# Altium PCB SCapacitor2.0_2020-03-19_00-03-24.pcbdoc (part 1 of 2)
Units mm, origin at the board's own origin, x right, y up, seen from the top; angles counter-clockwise.
Board outline 110 x 60 mm, 2 copper layers (Top Layer, Bottom Layer); 200 components, 118 nets, 675 pads, 143 vias.
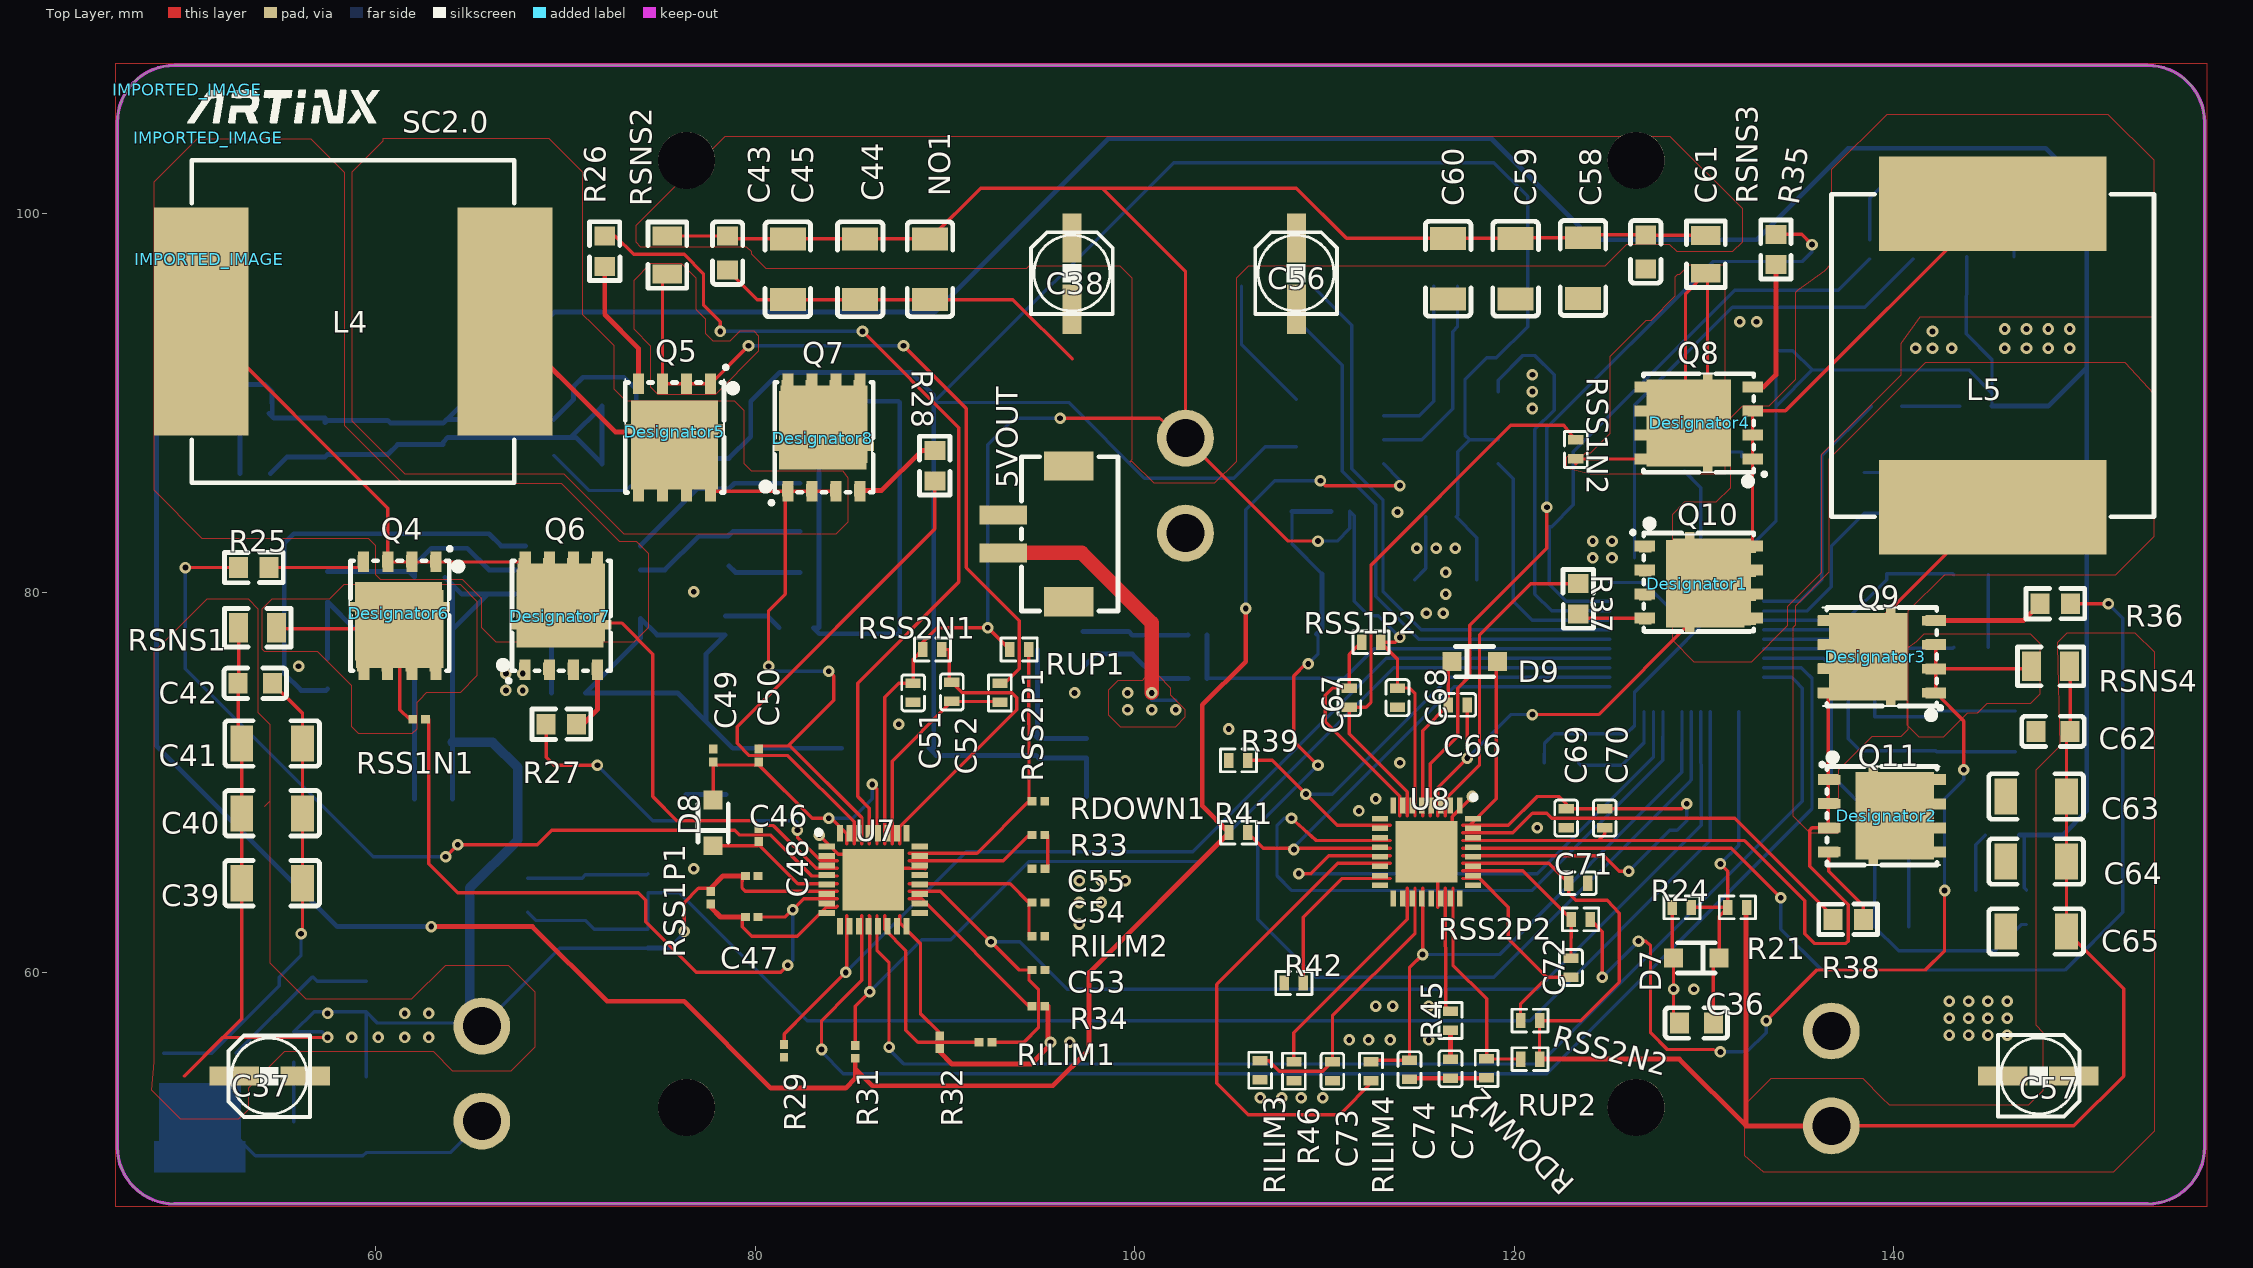
[diagram p0: Top Layer view]
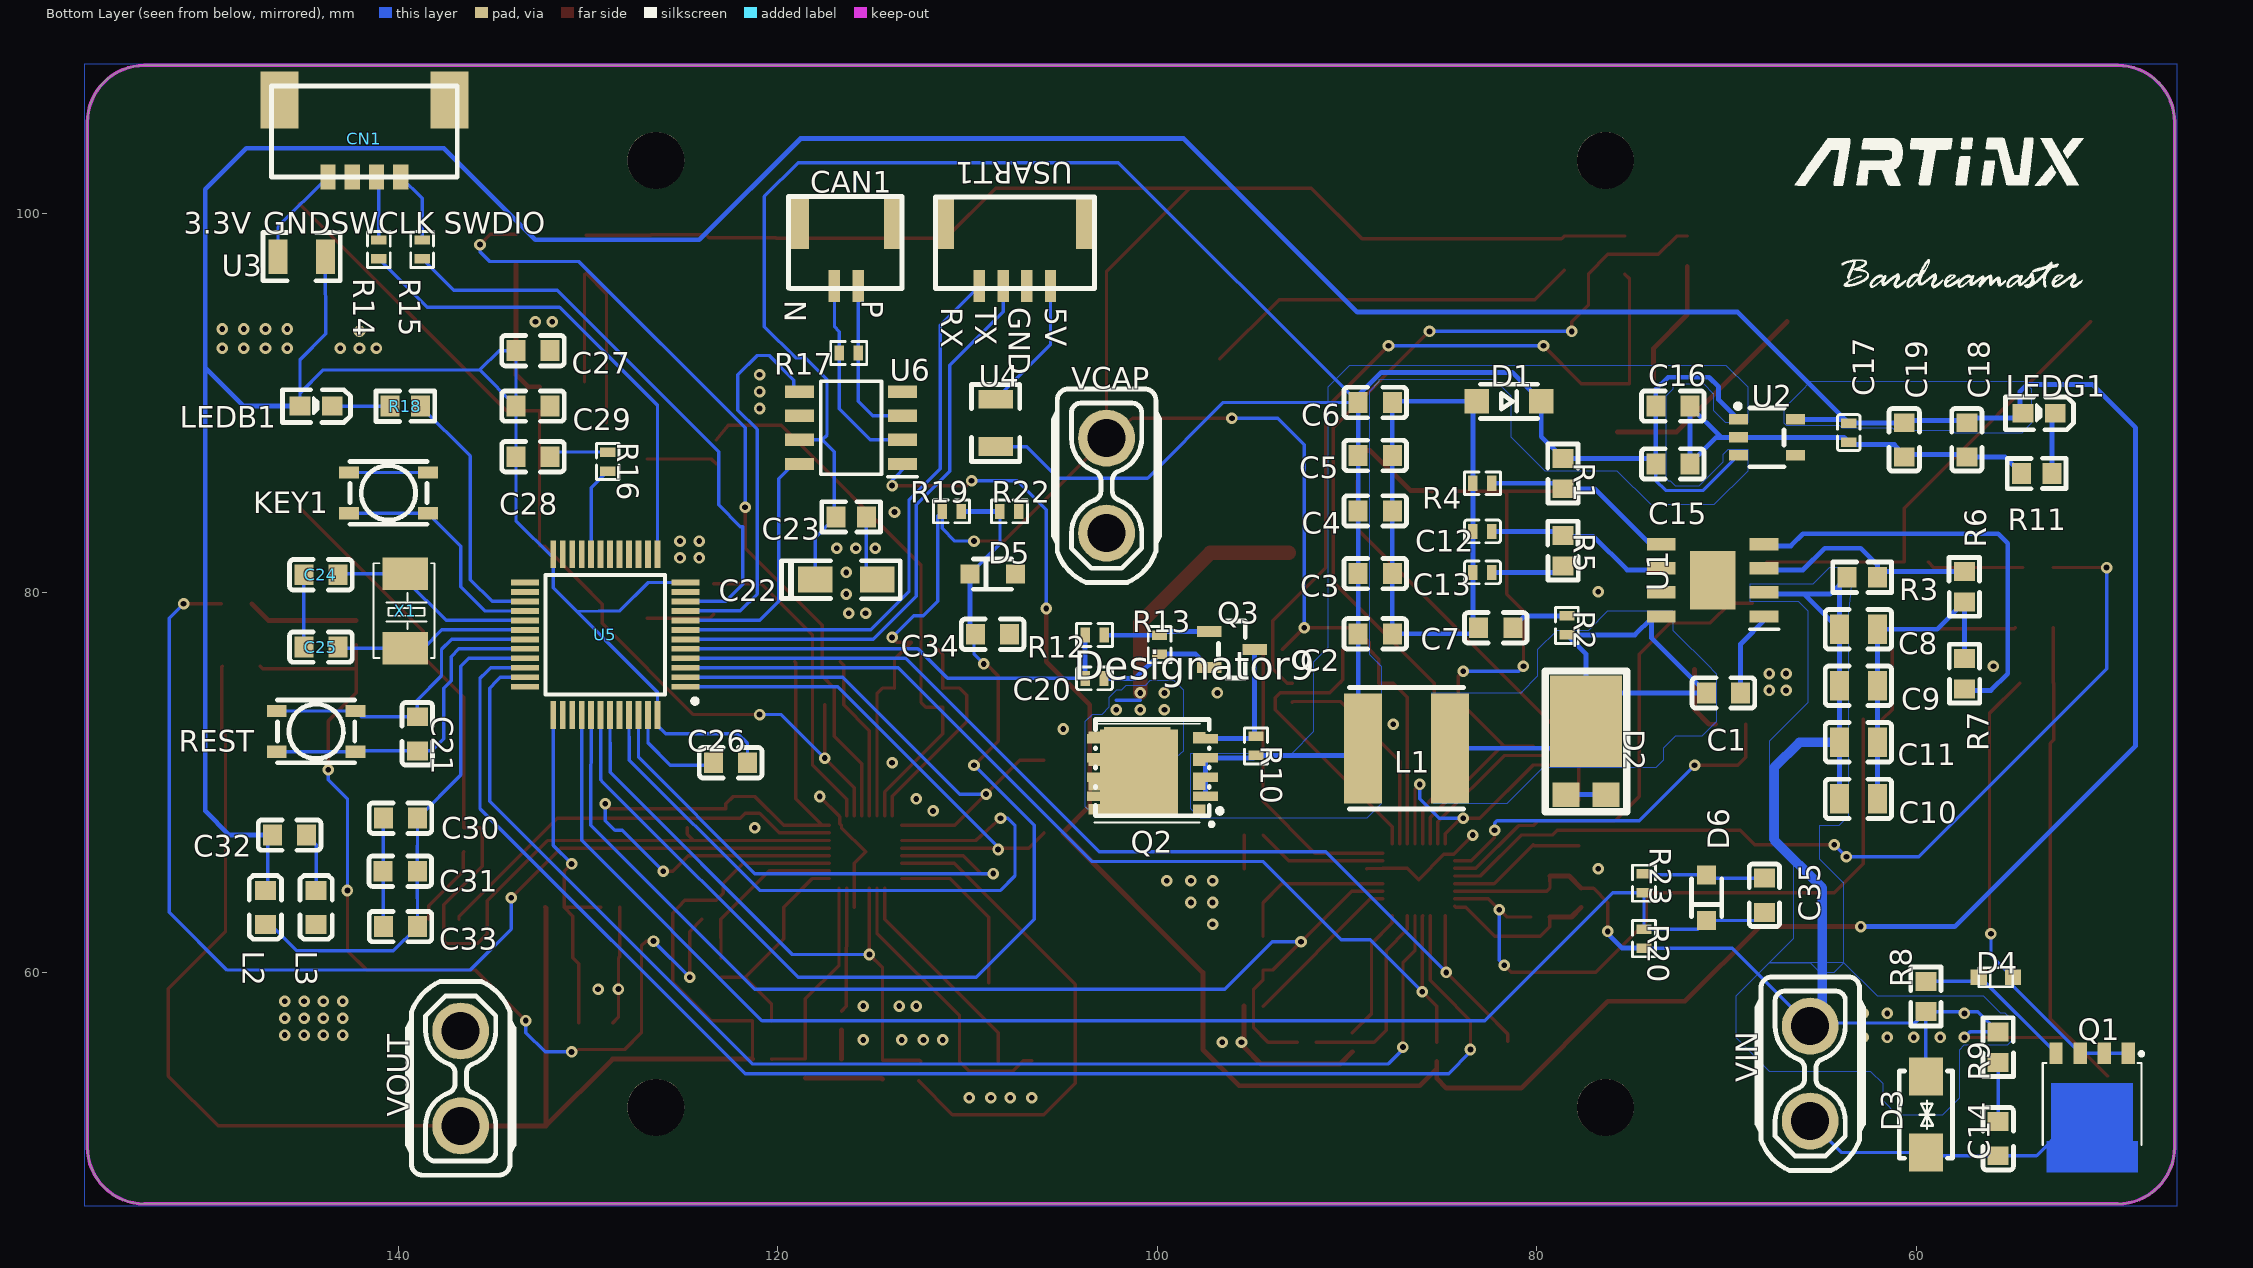
[diagram p1: Bottom Layer view, seen from below]

## Layer stack, top to bottom
Top Solder: solder mask 0.0102, Solder Resist, Dk 3.5
Top Layer: signal copper 0.0356
Dielectric1: dielectric 0.32, FR-4, Dk 4.8
Bottom Layer: signal copper 0.0356
Bottom Solder: solder mask 0.0102, Solder Resist, Dk 3.5

## Board outline
46.394,50.778 46.394,104.778 46.394,104.779 cw(c49.394,104.779) 49.394,107.779 49.394,107.78 153.394,107.78 cw(c153.393,104.779) 156.394,104.779 156.394,104.778 156.394,50.778 cw(c153.394,50.777) 153.394,47.777 49.394,47.777 cw(c49.394,50.778)

## Design rules (kind name [scope] priority, off if disabled: settings)
Clearance [All] p1: gap=0.254 ignorepadtopadclearanceinfootprint=FALSE except(0: Arc-Hole Track-Hole SMDPad-Hole THPad-Hole Via-Hole Fill-Hole Poly-Hole Region-Hole Text-Hole)
PolygonConnect [All] p1: connectstyle=Relief reliefconductorwidth=0.254 reliefentries=4 polygonreliefangle="90 Angle" airgapwidth=0.254
RoutingVias [All] p1: holewidth=0.711 width=1.27 viastyle="Through Hole" minholewidth=0.711 minwidth=1.27 maxholewidth=0.711 maxwidth=1.27
SolderMaskExpansion [All] p1: expansion=0.102
Width [All] p1: maxlimit=0.254 minlimit=0.254 preferedwidth=0.254
30 further rules are at their usual default settings.

## Components (designator, comment, footprint, x,y, rotation, side; value= is the part's Value field where it differs from the comment)
5VOUT "A2008WV-S-2P" CONN-SMD_A2008WV-S-2P 94.809,83.094 r90 top
C1 "100nF" C0603#1 70.172,74.712 r180 bottom
C2 "100nF" C0603#1 88.523,77.823 r180 bottom
C3 "22uF" C0603#1 88.523,80.998 r180 bottom
C4 "22uF" C0603#1 88.523,84.3 r180 bottom
C5 "22uF" C0603#1 88.523,87.221 r180 bottom
C6 "22uF" C0603#1 88.523,90.015 r180 bottom
C7 "100pF" C0603#1 82.173,78.141 r180 bottom
C8 "4.7uF" C0805 63.058,78.062 r180 bottom
C9 "4.7uF" C0805 63.058,75.082 r180 bottom
C10 "4.7uF" C0805 63.058,69.124 r180 bottom
C11 "4.7uF" C0805 63.058,72.103 r180 bottom
C12 "47pF" C0402#1 82.873,83.221 r0 bottom
C13 "4.7nF" C0402#1 82.873,81.062 r0 bottom
C14 "10nf" C0603#1 55.694,51.217 r270 bottom
C15 "22uF" C0603#1 72.839,86.777 r180 bottom
C16 "22uF" C0603#1 72.839,89.825 r180 bottom
C17 "100nF" C0402#1 63.567,88.428 r270 bottom
C18 "22uF" C0603#1 57.345,88.047 r270 bottom
C19 "22uF" C0603#1 60.646,88.047 r270 bottom
C20 "47pF" C0402#1 103.318,75.474 r180 bottom
C21 "100nF" C0603#1 139.007,72.553 r270 bottom
C22 "47uF" CASE-A_3216 116.399,80.681 r180 bottom
C23 "100nF" R0603#1 116.145,83.983 r0 bottom
C24 "33pF" C0603#1 144.087,80.935 r0 bottom
C25 "33pF" C0603#1 144.087,77.125 r0 bottom
C26 "100nF" C0603#1 122.495,71.029 r0 bottom
C27 "100nF" C0603#1 132.909,92.746 r0 bottom
C28 "100nF" C0603#1 132.909,87.158 r180 bottom
C29 "4.7uF" C0603#1 132.909,89.825 r180 bottom
C30 "1uF" C0603#1 139.894,68.108 r0 bottom
C31 "10nF" C0603#1 139.904,65.314 r0 bottom
C32 "100nF" C0603#1 145.74,67.215 r180 bottom
C33 "100nF" C0603#1 139.894,62.393 r0 bottom
C34 "100nf" C0603#1 108.687,77.798 r180 bottom
C35 "100nf" C0603#1 68.013,64.044 r90 bottom
C36 "100nf" C0603#2 129.608,57.313 r0 top
C37 "220uF" SMD-EC-F4 54.423,54.519 r0 top
C38 "220uF" SMD-EC-F4 96.714,96.81 r270 top
C39 "10uF" C1206 54.55,64.679 r180 top
C40 "10uF" C1206 54.55,68.362 r180 top
C41 "10uF" C1206 54.55,72.045 r180 top
C42 "100nF" C0603#2 53.662,75.22 r180 top
C43 "100nF" C0603#2 78.554,97.887 r90 top
C44 "10uF" C1206 85.538,97.036 r90 top
C45 "10uF" C1206 81.728,97.036 r90 top
C46 "100nf" CAPC0603X33N 80.204,67.219 r90 top
C47 "47pf" CAPC0603X33N 79.823,62.901 r180 top
C48 "1u" CAPC0603X33N 79.823,65.06 r180 top
C49 "1u" CAPC0603X33N 77.791,71.41 r90 top
C50 "100nf" CAPC0603X33N 80.204,71.41 r270 top
C51 "1uf" C0402#2 88.332,74.712 r90 top
C52 "47pf" C0402#2 90.371,74.76 r90 top
C53 "10nf" CAPC0603X33N 94.936,60.107 r180 top
C54 "2.2nf" CAPC0603X33N 94.936,63.663 r180 top
C55 "47nf" CAPC0603X33N 94.936,65.441 r0 top
C56 "220uF" SMD-EC-F4 108.525,96.81 r270 top
C57 "220uF" SMD-EC-F4 147.629,54.519 r180 top
C58 "10uF" C1206 123.638,97.102 r90 top
C59 "10uF" C1206 120.082,97.064 r90 top
C60 "10uF" C1206 116.526,97.064 r90 top
C61 "100nF" C0603#2 126.94,97.953 r90 top
C62 "100nF" C0603#2 148.404,72.68 r0 top
C63 "10uF" C1206 147.514,69.251 r0 top
C64 "10uF" C1206 147.514,65.822 r0 top
C65 "10uF" C1206 147.514,62.139 r0 top
C66 "1u" C0402#2 117.034,74.077 r0 top
C67 "47pf" C0402#2 111.319,74.458 r90 top
C68 "1u" C0402#2 113.859,74.458 r90 top
C69 "1u" C0402#2 122.749,68.108 r270 top
C70 "1u" C0402#2 124.781,68.108 r90 top
C71 "1uf" C0402#2 123.384,64.679 r180 top
C72 "47pf" C0402#2 123.003,60.234 r270 top
C73 "2.2nf" C0402#2 110.43,54.773 r90 top
C74 "10nf" C0402#2 114.491,54.849 r90 top
C75 "47nf" C0402#2 116.653,54.9 r90 top
CAN1 "GH1.25-2P-立式贴片" SMD-1.25MM-2P-JST-H4.05 116.399,97.826 r0 bottom
CN1 "molexP4卧" SMD-10.15X4.8-4P 141.799,103.922 r180 bottom
D1 "BZT52C5V1_C173407" SOD-123_L2.7-W1.6-LS3.7-RD 81.474,90.079 r180 bottom
D2 "SVM860VB_R2_00001" TO-277B_3P-L6.1-W4.3-LS7.0-BR 77.41,71.283 r90 bottom
D3 "SMAJ26CA-13-F" SMA_L4.4-W2.6-LS5.0-BI 59.503,52.487 r270 bottom
D4 "BZX584C9V1" SOD-523F_L1.7-W0.9-LS1.7-RD 55.82,59.726 r0 bottom
D5 "BZT52C3V3S_C173439" SOD-323_L1.8-W1.3-LS2.5-RD#1 108.687,80.973 r0 bottom
D6 "BZT52C3V3S_C173439" SOD-323_L1.8-W1.3-LS2.5-RD#1 71.06,63.917 r270 bottom
D7 "BZT52C3V3S_C173439" SOD-323_L1.8-W1.3-LS2.5-RD#2 129.607,60.742 r180 top
D8 "1N4148WS T4" SOD-323_L1.8-W1.3-LS2.5-FD 77.791,67.854 r270 top
D9 "1N4148WS T4" SOD-323_L1.8-W1.3-LS2.5-FD 117.923,76.363 r180 top
Designator1 "Comment" AON6508 129.667,80.465 r270 top
Designator2 "Comment" AON6508 139.64,68.235 r270 top
Designator3 "Comment" AON6508 139.065,76.617 r90 top
Designator4 "Comment" AON6508 129.794,88.936 r90 top
Designator5 "Comment" AON6508 75.759,88.462 r180 top
Designator6 "Comment" AON6508 61.214,78.903 r180 top
Designator7 "Comment" AON6508 69.723,78.74 r0 top
Designator8 "Comment" AON6508 83.566,88.133 r0 top
Designator9 "Comment" AON6508 100.55,70.485 r90 bottom
IMPORTED_IMAGE "Comment" IMPORTED_IMAGE 50.069,106.497 r0 top
IMPORTED_IMAGE "Comment" IMPORTED_IMAGE 51.248,97.561 r0 top
IMPORTED_IMAGE "Comment" IMPORTED_IMAGE 51.176,103.972 r0 top
KEY1 "SKRPABE010" KEY-SMD-4P_L4.2-W3.2-H2.5 140.529,85.253 r0 bottom
L1 "4.7uH" IND-SMD_L6.0-W6.0 86.872,71.791 r180 bottom
L2 "10uH" L0603 147.01,63.403 r90 bottom
L3 "10uH" L0603 144.343,63.403 r90 bottom
L4 "2.2uH" IND-SMD_L17.5-W17.0_YXMAC1770 58.815,94.283 r0 top
L5 "2.2uH" IND-SMD_L17.5-W17.0_YXMAC1770 145.228,92.492 r270 top
LEDB1 "LEDB" LED-0603 144.339,89.825 r180 bottom
LEDG1 "LED3V3" LED-0603 53.534,89.444 r180 bottom
NO1 "10uF" C1206 89.221,97.036 r90 top
Q1 "PSMN1R5-30YLC,115" SOT-669_L4.9-W4.0-P1.27-LS6.0-BR 50.741,53.757 r270 bottom
Q2 "TPCA8123,L1Q" POWERVDFN-8_L6.0-W5.0-P1.27-BL 100.27,70.775 r270 bottom
Q3 "PMBT3904,215" SOT-23_L2.9-W1.3-P0.95-LS2.4-BR 96.078,76.998 r180 bottom
Q4 "HD70N08" "PDFN-8_L4.9-W5.8-P1.27-LS6.1-BL FOR3" 61.281,78.776 r180 top
Q5 "HD70N08" "PDFN-8_L4.9-W5.8-P1.27-LS6.1-BL FOR3" 75.759,88.174 r180 top
Q6 "HD70N08" "PDFN-8_L4.9-W5.8-P1.27-LS6.1-BL FOR3" 69.79,78.776 r0 top
Q7 "HD70N08" "PDFN-8_L4.9-W5.8-P1.27-LS6.1-BL FOR3" 83.633,88.174 r0 top
Q8 "HD70N08" "PDFN-8_L4.9-W5.8-P1.27-LS6.1-BL FOR3" 129.734,88.936 r90 top
Q9 "HD70N08" "PDFN-8_L4.9-W5.8-P1.27-LS6.1-BL FOR3" 139.386,76.617 r90 top
Q10 "HD70N08" "PDFN-8_L4.9-W5.8-P1.27-LS6.1-BL FOR3" 129.734,80.554 r270 top
Q11 "HD70N08" "PDFN-8_L4.9-W5.8-P1.27-LS6.1-BL FOR3" 139.386,68.235 r270 top
R1 "40.2K" R0603#1 78.625,86.269 r270 bottom
R2 "100" R0402#1 78.425,78.267 r270 bottom
R3 "309K" R0603#1 62.859,80.808 r180 bottom
R4 "7.68K" R0402#1 82.873,85.76 r0 bottom
R5 "17.8K" R0603#1 78.625,82.205 r270 bottom
R6 "68K" R0603#1 57.472,80.3 r270 bottom
R7 "68K" R0603#1 57.472,75.728 r90 bottom
R8 "100k" R0603#1 59.504,58.71 r90 bottom
R9 "33R" R0603#1 55.694,56.043 r270 bottom
R10 "10K" R0402#1 94.808,71.917 r90 bottom
R11 "1K" R0603#1 53.662,86.269 r0 bottom
R12 "1K" R0402#1 103.317,77.759 r0 bottom
R13 "10K" R0402#1 99.888,77.251 r270 bottom
R14 "120" R0402#1 141.037,98.078 r90 bottom
R15 "120" R0402#1 138.751,98.078 r90 bottom
R16 "10K" R0402#1 128.972,86.904 r90 bottom
R17 "120" R0402#1 116.272,92.62 r180 bottom
R18 "1K" R0603#1 139.641,89.825 r180 bottom
R19 "100K" R0402#1 110.848,84.275 r180 bottom
R20 "100K" R0402#1 74.361,61.757 r90 bottom
R21 "100K" R0402#2 131.768,63.408 r0 top
R22 "10K" R0402#1 107.8,84.275 r180 bottom
R23 "10K" R0402#1 74.361,64.678 r90 bottom
R24 "10K" R0402#2 128.847,63.408 r0 top
R25 "0" R0603#2 53.588,81.316 r0 top
R26 "0" R0603#2 72.077,97.986 r90 top
R27 "0" R0603#2 69.791,73.061 r0 top
R28 "0" R0603#2 89.476,86.683 r90 top
R29 "1k" CAPC0603X33N 81.529,55.844 r270 top
R31 "1k" CAPC0603X33N 85.283,55.788 r90 top
R32 "NC/270K/68K/0" CAPC0603X33N 89.728,56.296 r90 top
R33 "4.99k" CAPC0603X33N 94.935,67.218 r180 top
R34 "0/68K/NC" CAPC0603X33N 94.935,58.201 r180 top
R35 "0" R0603#2 133.799,98.08 r270 top
R36 "0" R0603#2 148.531,79.411 r0 top
R37 "0" R0603#2 123.385,79.665 r270 top
R38 "0" R0603#2 137.609,62.774 r0 top
R39 "1k" R0402#2 105.476,71.155 r180 top
R41 "1k" R0402#2 105.479,67.345 r0 top
R42 "NC/270K/68K/0" R0402#2 108.394,59.421 r0 top
R45 "4.99k" R0402#2 116.652,57.439 r90 top
R46 "0/68K/NC" R0402#2 108.397,54.772 r90 top
RDOWN1 "1k" CAPC0603X33N 94.935,68.996 r180 top
RDOWN2 "1k" R0402#2 118.554,54.917 r90 top
REST "SKRPABE010" KEY-SMD-4P_L4.2-W3.2-H2.5 144.34,72.68 r180 bottom
RILIM1 "10K" CAPC0603X33N 92.144,56.296 r0 top
RILIM2 "10K" CAPC0603X33N 94.935,61.884 r180 top
RILIM3 "10K" R0402#2 106.619,54.823 r90 top
RILIM4 "6.04K" R0402#2 112.461,54.772 r90 top
RSNS1 "0.01" R0805 53.787,78.141 r0 top
RSNS2 "0.01" R0805 75.377,97.785 r90 top
RSNS3 "0.01" R0805 130.114,97.826 r270 top
RSNS4 "0.01" R0805 148.275,76.109 r0 top
RSS1N1 "1k" CAPC0603X33N 62.296,73.314 r180 top
RSS1N2 "1k" R0402#2 123.257,87.539 r270 top
RSS1P1 "1k" CAPC0603X33N 77.663,63.916 r90 top
RSS1P2 "1k" R0402#2 112.464,77.378 r0 top
RSS2N1 "1k" R0402#2 89.347,76.997 r180 top
RSS2N2 "1K" R0402#2 120.846,57.439 r0 top
RSS2P1 "1k" R0402#2 92.903,74.711 r90 top
RSS2P2 "1k" R0402#2 123.513,62.773 r0 top
RUP1 "20.5K" R0402#2 93.919,76.997 r180 top
RUP2 "20K" R0402#2 120.846,55.407 r0 top
U1 "TPS54540DDAR" SOIC127P600X170-9N 70.739,80.645 r0 bottom
U2 "LP5907MFX-2.5/NOPB" SOT-23-5_L3.0-W1.7-P0.95-LS2.8-BL 67.885,88.174 r90 bottom
U3 "MF-NSMF050-2" FUSE-1206 145.101,97.699 r180 bottom
U4 "MF-NSMF050-2" FUSE-1206 108.525,88.936 r270 bottom
U5 "STM32F103C8T6" QFP50P900X900X160-48N 129.099,77.779 r0 bottom
U6 "TJA1051T/3/1J" SOIC127P600X175-8N 116.145,88.682 r0 bottom
U7 "SC8701QDER" QFN50P500X500X100-33N-D 86.229,64.86 r0 top
U8 "SC8701QDER" QFN50P500X500X100-33N-D 115.383,66.33 r270 top
USART1 "GH1.25-4P-立式贴片" SMD-1.25MM-4P-JST-H4.05 107.509,97.826 r0 bottom
VCAP "XT30UF" CONN-TH_XT30UPB-F 102.683,85.634 r90 bottom
VIN "XT30UM" CONN-TH_XT30UPB-F 65.599,54.646 r90 bottom
VOUT "XT30UF" CONN-TH_XT30UPB-F 136.719,54.392 r270 bottom
X1 "8MHz" SMD-5032_2P 139.641,79.03 r90 bottom
? "" ? 150.91,77.859 r0 top
? "" ? 101.422,109.456 r0 top
? "" ? 57.272,77.779 r0 top
? "" ? 101.394,45.542 r0 top
? "" ? 61.394,45.509 r0 top

## Footprints (in the part's own frame and the unit in brackets; to place one, negate y for a bottom-side part, rotate by r counter-clockwise, add the part's x,y. Pads: shape width x height; smd on the part's side, far side on the other; paste and mask are expansions set on the pad)
AON6508 [mm]
  rect 0.5x0.65 smd: 1(-1.905,-2.75) 2(-0.635,-2.75) 3(0.635,-2.75) 4(1.905,-2.75)
  rect 0.55x0.65 smd: 5(1.905,2.75) 6(0.635,2.75) 7(-0.635,2.75) 8(-1.905,2.75)
  rect 4.6x4.12 smd: 9(0,0.415)
  silkscreen extent -2.8,-3.5 2.6,2.8, body extent -2.6,-3.03 2.6,3.02, height 1.1
C0402#1 [mm]
  rect 0.5x0.8 smd: 1(0.5,0) 2(-0.5,0)
  silkscreen extent -0.95,-0.6 0.95,0.6
C0402#2 [mm]
  rect 0.5x0.8 smd: 1(-0.5,0) 2(0.5,0)
  silkscreen extent -0.95,-0.6 0.95,0.6
C0603#1 [mm]
  rect 1x1.1 smd: 1(0.9,0) 2(-0.9,0)
  silkscreen extent -1.65,-0.8 1.65,0.8
C0603#2 [mm]
  rect 1x1.1 smd: 1(-0.9,0) 2(0.9,0)
  silkscreen extent -1.65,-0.8 1.65,0.8
C0805 [mm]
  rect 1x1.55 smd: 1(1,0) 2(-1,0)
  silkscreen extent -1.75,-1.04 1.75,1.04
C1206 [mm]
  rect 1.2x1.9 smd: 1(-1.6,0) 2(1.6,0)
  silkscreen extent -2.5,-1.2 2.5,1.2
CAPC0603X33N [mm]
  rect 0.47x0.44 smd: 1(-0.335,0) 2(0.335,0)
  body extent -0.3,-0.15 0.3,0.15, height 0.33
CASE-A_3216 [mil]
  rect 71.5x53.5 smd: 1(-64.5,0) 2(64.5,0)
  silkscreen extent -134,-40 112,39
CONN-SMD_A2008WV-S-2P [mil]
  rect 61x102.4 smd: 0(-140.76,-67.89) 0(140.76,-67.89)
  rect 39.4x98.4 smd: 1(-39.36,67.91) 2(39.34,67.91)
  silkscreen extent -160,-170 160,30
CONN-TH_XT30UPB-F [mm]
  round 3 hole 2: 1(2.499,0) 2(-2.501,0)
  silkscreen extent -5.1,-2.8 5.1,2.8
FUSE-1206 [mm]
  rect 1x1.801 smd: 1(1.25,0) 2(-1.25,0)
  silkscreen extent -2.03,-1.27 2.03,1.27
IMPORTED_IMAGE [mm]
  silkscreen extent 0,-1.78 10.16,0
IND-SMD_L6.0-W6.0 [mm]
  rect 2x5.8 smd: 1(2.3,0) 2(-2.3,0)
  silkscreen extent -3,-3.2 3,3.2
IND-SMD_L17.5-W17.0_YXMAC1770 [mm]
  rect 5x12 smd: 1(-8,0) 2(8,0)
  silkscreen extent -8.5,-8.5 8.5,8.5
KEY-SMD-4P_L4.2-W3.2-H2.5 [mm]
  rect 1.05x0.65 smd: 1(2.075,-1.075) 2(-2.075,-1.075) 3(2.075,1.075) 4(-2.075,1.075)
  silkscreen extent -2.03,-1.65 2.03,1.65
L0603 [mm]
  rect 1x1.1 smd: 1(0.9,0) 2(-0.9,0)
  silkscreen extent -1.68,-0.85 1.68,0.85
LED-0603 [mil]
  rect 43x39 smd: 1(-33.5,0) 2(33.5,0)
  silkscreen extent -70,-34 72,34
"PDFN-8_L4.9-W5.8-P1.27-LS6.1-BL FOR3" [mm]
  rect 0.58x1.079 smd: 3(-1.905,-2.835) 3(-0.635,-2.835) 3(0.635,-2.835) 4(1.905,-2.835)
  rect 0.95x0.5 smd: 8(-2.169,-0.465) 8(2.169,-0.465)
  rect 0.58x1.08 smd: 8(-1.9,2.835) 8(-0.63,2.835) 8(0.64,2.835) 8(1.9,2.835)
  rect 4.6x4.1 smd: 8(0,0.695)
  silkscreen extent -3.2,-2.89 2.6,2.9
POWERVDFN-8_L6.0-W5.0-P1.27-BL [mil]
  rect 19.68x51.18 smd: 1(60,110.24) 2(20,110.24) 3(-20,110.24) 4(-60,110.24) 5(-60,-110.24) 6(-20,-110.24) 7(20,-110.24) 8(60,-110.24)
  rect 167.32x137.79 smd: 8(0,-31.5)
  silkscreen extent -100,-118 100,145
QFN50P500X500X100-33N-D [mm]
  rect 0.85x0.3 smd: 1(-2.45,1.75) 2(-2.45,1.25) 3(-2.45,0.75) 4(-2.45,0.25) 5(-2.45,-0.25) 6(-2.45,-0.75) 7(-2.45,-1.25) 8(-2.45,-1.75) 17(2.45,-1.75) 18(2.45,-1.25) 19(2.45,-0.75) 20(2.45,-0.25) 21(2.45,0.25) 22(2.45,0.75) 23(2.45,1.25) 24(2.45,1.75)
  rect 0.3x0.85 smd: 9(-1.75,-2.45) 10(-1.25,-2.45) 11(-0.75,-2.45) 12(-0.25,-2.45) 13(0.25,-2.45) 14(0.75,-2.45) 15(1.25,-2.45) 16(1.75,-2.45) 25(1.75,2.45) 26(1.25,2.45) 27(0.75,2.45) 28(0.25,2.45) 29(-0.25,2.45) 30(-0.75,2.45) 31(-1.25,2.45) 32(-1.75,2.45)
  rect 3.25x3.25 smd: 33(0,0)
  silkscreen extent -3,2.38 -2.75,2.62, body extent -2.55,-2.55 2.55,2.55, height 1
QFP50P900X900X160-48N [mm]
  rect 1.475x0.3 smd: 1(-4.238,2.75) 2(-4.238,2.25) 3(-4.238,1.75) 4(-4.238,1.25) 5(-4.238,0.75) 6(-4.238,0.25) 7(-4.238,-0.25) 8(-4.238,-0.75) 9(-4.238,-1.25) 10(-4.238,-1.75) 11(-4.238,-2.25) 12(-4.238,-2.75) 25(4.238,-2.75) 26(4.238,-2.25) 27(4.238,-1.75) 28(4.238,-1.25) 29(4.238,-0.75) 30(4.238,-0.25) 31(4.238,0.25) 32(4.238,0.75) 33(4.238,1.25) 34(4.238,1.75) 35(4.238,2.25) 36(4.238,2.75)
  rect 0.3x1.475 smd: 13(-2.75,-4.238) 14(-2.25,-4.238) 15(-1.75,-4.238) 16(-1.25,-4.238) 17(-0.75,-4.238) 18(-0.25,-4.238) 19(0.25,-4.238) 20(0.75,-4.238) 21(1.25,-4.238) 22(1.75,-4.238) 23(2.25,-4.238) 24(2.75,-4.238) 37(2.75,4.238) 38(2.25,4.238) 39(1.75,4.238) 40(1.25,4.238) 41(0.75,4.238) 42(0.25,4.238) 43(-0.25,4.238) 44(-0.75,4.238) 45(-1.25,4.238) 46(-1.75,4.238) 47(-2.25,4.238) 48(-2.75,4.238)
  silkscreen extent -4.85,-3.15 3.15,3.62, body extent -4.5,-4.5 4.5,4.5, height 1.6
R0402#1 [mm]
  rect 0.5x0.8 smd: 1(0.5,0) 2(-0.5,0)
  silkscreen extent -0.95,-0.6 0.95,0.6
R0402#2 [mm]
  rect 0.5x0.8 smd: 1(-0.5,0) 2(0.5,0)
  silkscreen extent -0.95,-0.6 0.95,0.6
R0603#1 [mm]
  rect 1x1.1 smd: 1(0.8,0) 2(-0.8,0)
  silkscreen extent -1.55,-0.81 1.55,0.8
R0603#2 [mm]
  rect 1x1.1 smd: 1(-0.8,0) 2(0.8,0)
  silkscreen extent -1.55,-0.8 1.55,0.81
R0805 [mm]
  rect 1x1.55 smd: 1(-1,0) 2(1,0)
  silkscreen extent -1.75,-1.02 1.75,1.02
SMA_L4.4-W2.6-LS5.0-BI [mm]
  rect 2x1.8 smd: 1(2,0) 2(-2,0)
  silkscreen extent -2.3,-1.4 2.3,1.4
SMD-1.25MM-2P-JST-H4.05 [mm]
  rect 0.599x1.702 smd: 1(0.625,1.675) 2(-0.625,1.675)
  rect 0.998x2.799 smd: 3(2.475,-1.675)
  rect 1x2.8 smd: 4(-2.475,-1.675)
  silkscreen extent -2.94,-3.05 3.05,1.8
SMD-1.25MM-4P-JST-H4.05 [mm]
  rect 0.599x1.702 smd: 1(1.875,1.675) 2(0.625,1.675) 3(-0.625,1.675) 4(-1.875,1.675)
  rect 1x2.8 smd: 5(3.725,-1.675) 6(-3.725,-1.675)
  silkscreen extent -4.19,-3.02 4.19,1.8
SMD-10.15X4.8-4P [mm]
  rect 2x3 smd: 0(-4.479,2.025) 0(4.479,2.025)
  rect 0.8x1.3 smd: 1(-1.92,-2.025) 2(-0.64,-2.025) 3(0.64,-2.025) 4(1.92,-2.025)
  silkscreen extent -4.9,-2.03 4.9,2.78
SMD-5032_2P [mm]
  rect 1.7x2.4 smd: 1(1.96,-0.001) 2(-1.96,0.001)
  silkscreen extent -2.49,-1.55 2.51,1.67
SMD-EC-F4 [mm]
  rect 2.6x1 smd: 1(-1.877,0) 2(1.877,0)
  silkscreen extent -2.18,-2.16 2.12,2.14, body extent -2.52,-2.15 2.48,2.15, height 5.5
SOD-123_L2.7-W1.6-LS3.7-RD [mm]
  rect 1.3x1.3 smd: 1(1.7,0) 2(-1.7,0)
  silkscreen extent -1.5,-0.9 1.5,0.9
SOD-323_L1.8-W1.3-LS2.5-FD [mm]
  rect 1x1 smd: 1(-1.2,0) 2(1.2,0)
  silkscreen extent -1,-0.8 1,0.8
SOD-323_L1.8-W1.3-LS2.5-RD#1 [mm]
  rect 1x1 smd: 1(1.2,0) 2(-1.2,0)
  silkscreen extent -1,-0.8 1,0.8
SOD-323_L1.8-W1.3-LS2.5-RD#2 [mm]
  rect 1x1 smd: 1(-1.2,0) 2(1.2,0)
  silkscreen extent -1,-0.8 1,0.8
SOD-523F_L1.7-W0.9-LS1.7-RD [mm]
  rect 0.85x0.8 smd: 1(0.9,0) 2(-0.9,0)
  silkscreen extent -0.9,-0.5 0.9,0.5
SOIC127P600X170-9N [mm]
  rect 1.525x0.65 smd: 1(-2.712,1.905) 2(-2.712,0.635) 3(-2.712,-0.635) 4(-2.712,-1.905) 5(2.712,-1.905) 6(2.712,-0.635) 7(2.712,0.635) 8(2.712,1.905)
  rect 2.4x3.1 smd: 9(0,0)
  silkscreen extent -3.47,2.58 -1.95,2.58, body extent -3,-2.45 3,2.45, height 1.7
SOIC127P600X175-8N [mm]
  rect 1.525x0.65 smd: 1(-2.712,1.905) 2(-2.712,0.635) 3(-2.712,-0.635) 4(-2.712,-1.905) 5(2.712,-1.905) 6(2.712,-0.635) 7(2.712,0.635) 8(2.712,1.905)
  silkscreen extent -3.47,-2.45 1.6,2.58, body extent -3,-2.45 3,2.45, height 1.75
SOT-23-5_L3.0-W1.7-P0.95-LS2.8-BL [mm]
  rect 0.55x1 smd: 1(0.95,1.5) 2(0,1.5) 3(-0.95,1.5) 4(-0.95,-1.5) 5(0.95,-1.5)
  silkscreen extent -1.55,-0.9 1.78,1.65
SOT-23_L2.9-W1.3-P0.95-LS2.4-BR [mm]
  rect 1.3x0.6 smd: 1(-1.2,0.95) 2(-1.2,-0.95) 3(1.2,0)
  silkscreen extent -0.7,-1.5 0.7,1.5
SOT-669_L4.9-W4.0-P1.27-LS6.0-BR [mm]
  rect 1.148x0.701 smd: 1(-1.963,1.905) 2(-1.967,0.635) 3(-1.967,-0.635) 4(-1.963,-1.905)
  round 0 smd: 5(1.967,0)
  Top Layer region: 4.317,-2.4 4.317,2.4 2.667,2.4 2.667,2.15 -0.383,2.15 -0.383,-2.15 2.667,-2.15 2.667,-2.4
  silkscreen extent -2,-2.6 2.87,2.67
TO-277B_3P-L6.1-W4.3-LS7.0-BR [mm]
  rect 1.29x1.422 smd: 1(-1.933,1.057) 2(-1.933,-1.057)
  rect 4.8x3.8 smd: 3(1.933,0)
  silkscreen extent -2.84,-2.15 4.58,2.15
? [mm]

## Free pads (board coordinates)
  round 3 hole 3 unplated: ""(76.394,52.868) ""(76.394,102.779) ""(126.432,52.868) ""(126.432,102.779)

## Via types
v1: diameter 0.61, hole 0.305, Top Layer to Bottom Layer, 143 vias

## Nets (pads, with @x,y where several pads share a name; then routed paths per layer and width w, separated by ;. In a path a pad name is that pad's centre, name@x,y a point inside that pad or via, vN(x,y) a via of type N, cw(c..) or ccw(c..) an arc to the next point about the centre after c; other vN are vias at no path point)
AVCC-3.3: C30.2 C31.2 C33.2 L2.2 U5.9 | length 27.5
  Bottom Layer w0.178: 133.148,76.528 136.3,76.528 136.719,76.109 136.719,70.383 C30.2@138.994,68.108 C31.2@139.004,65.314 C33.2@138.994,62.393 ; C33.2@138.994,62.393 140.264,61.123 145.355,61.123 146.736,62.503 L2.2@147.01,62.503
BOOT0: R16.2 U5.44 | length 4.9
  Bottom Layer w0.178: R16.2@128.972,86.404 129.849,85.527 129.849,81.829
C14_1: C14.1 D3.1 Q1.5 VIN.2 | length 16.2
  Bottom Layer w0.178: 50.74,51.788 52.201,51.788 53.671,50.317 C14.1@55.693,50.317 ; C14.1@55.693,50.317 59.333,50.317 D3.1@59.503,50.487 63.941,50.487 VIN.2@65.599,52.145
CAN_N: CAN1.1 R17.2 U6.6 | length 10.9
  Bottom Layer w0.178: 113.123,88.047 115.129,88.047 116.772,89.691 R17.2@116.772,92.619 ; R17.2@116.772,92.62 116.772,93.754 117.024,94.026 CAN1.1@117.024,96.152
CAN_P: CAN1.2 R17.1 U6.7 | length 9
  Bottom Layer w0.178: 113.123,89.317 115.002,89.317 115.764,90.079 R17.1@115.772,92.619 ; R17.1@115.772,92.62 CAN1.2@115.774,96.152
CAN_R: U5.32 U6.4 | length 13.1
  Bottom Layer w0.178: 119.168,86.777 119.955,85.99 119.955,79.538 120.964,78.529 125.049,78.529
CAN_T: U5.33 U6.1 | length 20.8
  Bottom Layer w0.178: 119.168,90.587 119.168,91.196 120.463,92.492 121.098,92.492 122.114,91.476 122.114,89.609 121.098,88.593 121.098,79.919 121.987,79.03 125.05,79.03
CN1_1: CN1.1 U3.2 | length 5.3
  Bottom Layer w0.178: CN1.1@143.719,101.897 146.351,99.265 U3.2@146.351,97.699
CN1_3: CN1.3 R14.1 | length 3.4
  Bottom Layer w0.178: R14.1@141.037,98.578 141.037,101.774 CN1.3@141.159,101.897
CN1_4: CN1.4 R15.1 | length 3.8
  Bottom Layer w0.178: R15.1@138.751,98.578 138.751,100.769 CN1.4@139.879,101.897
CN2_4: U4.2 USART1.4 | length 7.2
  Bottom Layer w0.178: USART1.4@105.635,96.151 105.635,93.076 U4.2@108.525,90.186
EN1: R29.1 U5.28 U7.1 | length 55.1
  Top Layer w0.178: R29.1@81.53,56.342 81.53,56.734 82.744,57.948 84.829,60.033 84.829,62.959
  Bottom Layer w0.178: v1(84.776,59.98) 91.126,66.33 103.064,66.33 113.263,76.529 125.049,76.529
EN2: R39.1 U5.26 U8.1 | length 27.5
  Top Layer w0.178: R39.1@105.976,71.155 107.255,71.156 110.681,67.73 113.483,67.73
  Bottom Layer w0.178: v1(109.033,69.378) 110.43,69.378 116.581,75.529 125.049,75.529
GND: 5VOUT.2 C2.1 C3.1 C4.1 C5.1 C6.1 C7.2 C8.1 C9.1 C10.1 C11.1 C12.1 C13.1 C15.1 C16.1 C17.1 C18.1 C19.1 C20.1 C21.1 C22.2 C23.2 C24.1 C25.1 C26.1 C27.2 C28.1 C29.1 C30.1 C31.1 C32.1 C33.1 C34.1 C35.1 C36.1 C37.2 C38.2 C39.1 C40.1 C41.1 C42.1 C43.1 C44.1 C45.1 C48.1 C49.2 C51.1 C53.1 C54.1 C55.1 C56.2 C57.2 C58.1 C59.1 C60.1 C61.1 C62.1 C63.1 C64.1 C65.1 C68.1 C69.2 C71.1 C73.1 C74.1 C75.1 CAN1.3 CAN1.4 CN1.2 D1.2 D2.1 D2.2 D4.2 D5.2 D6.2 D7.2 KEY1.1 KEY1.2 L3.1 L3.2 NO1.1 Q1.1 Q1.2 Q1.3 Q3.2 Q6.3 Q7.8 Q10.3 Q11.8 R4.1 R6.1 R7.1 R11.1 R13.1 R16.1 R22.1 R23.1 R24.1 R29.2 R32.1 R34.1 R39.2 R42.1 R46.1 RDOWN1.1 RDOWN2.1 REST.1 REST.2 RILIM2.1 RILIM3.1 U1.7 U1.9 U2.2 U5.8 U5.23 U5.35 U5.47 U6.2 U6.8 U7.14 U7.25 U7.33 U8.14 U8.25 U8.33 USART1.3 USART1.5 USART1.6 VCAP.2 VOUT.2 | length 215.5
  Top Layer w0.178: C42.1@54.562,75.22 56.15,73.632 C41.1@56.15,72.045 C40.1@56.15,68.362 C39.1@56.15,64.679 56.15,62.088 v1(56.074,62.012) ; C43.1@78.554,96.987 80.105,95.436 C45.1@81.728,95.436 C44.1@85.538,95.436 NO1.1@89.221,95.436 93.588,95.436 96.714,92.31 ; v1(83.379,67.219) 83.379,67.21 84.329,66.26 ; 84.329,66.261 84.385,66.203 84.903,66.203 U7.33@86.229,64.86 ; U7.33@86.229,64.86 86.829,65.46 88.129,65.46 ; 88.129,65.461 88.967,65.441 ; 115.983,63.409 115.983,64.43 115.983,65.73 U8.33@115.383,66.33 116.653,67.6 116.653,67.727 116.74,67.814 116.74,68.187 116.783,68.23 117.796,69.242 v1(117.796,69.251) ; R24.1@128.346,63.408 128.345,60.804 D7.2@128.407,60.742 v1(128.407,59.101) 128.407,57.613 C36.1@128.708,57.313
  Top Layer w0.254: R32.1@89.729,55.796 90.372,55.154 94.555,55.154 95.436,56.035 R34.1@95.436,58.202 ; C74.1@114.491,54.349 114.542,54.4 C75.1@116.653,54.4 RDOWN2.1@118.554,54.417
  Bottom Layer w0.178: Q1.1@48.835,55.72 Q1.2@50.105,55.725 ; Q1.2@50.105,55.724 51.375,55.724 54.92,59.269 D4.2@54.92,59.726 56.074,60.88 v1(56.074,62.012) ; C35.1@68.012,64.944 70.887,64.944 71.06,65.117 74.3,65.117 R23.1@74.361,65.178 ; C22.2@114.761,80.681 115.345,81.265 C23.2@115.345,83.983 ; C26.1@123.395,71.029 123.522,70.902 125.67,70.902 126.849,72.081 U5.47@126.849,73.729 ; R16.1@128.972,87.404 132.01,87.404 C28.1@132.009,87.158 ; 133.148,77.028 136.816,77.028 137.227,76.617 137.227,75.347 137.608,74.966 137.608,72.299 138.253,71.653 C21.1@139.007,71.653 ; KEY1.2@138.454,86.328 KEY1.1@142.604,86.328 ; C21.1@139.007,71.653 142.217,71.653 REST.1@142.265,71.605 REST.2@146.415,71.605 ; C33.1@140.793,62.393 C31.1@140.803,65.314 ; C31.1@140.804,65.314 140.804,67.991 C30.1@140.921,68.108 ; L3.1@144.343,64.304 144.343,66.717 C32.1@144.84,67.214 ; C25.1@144.987,77.125 C24.1@144.987,80.935
  Bottom Layer w0.254: R11.1@54.461,86.269 55.339,87.147 57.344,87.147 57.471,87.274 C19.1@60.646,87.274 ; R7.1@57.471,76.528 57.471,79.5 58.908,78.063 62.059,78.063 62.059,75.083 62.059,72.103 C10.1@62.059,69.124 ; C19.1@60.646,87.274 61.164,87.793 63.567,87.793 C17.1@63.567,87.928 63.813,88.174 U2.2@69.385,88.174 ; D2.2@76.353,69.35 D2.1@78.467,69.35 ; Q3.2@97.279,76.048 97.983,76.752 R13.1@99.888,76.751 101.167,75.474 C20.1@102.818,75.474 ; U2.2@69.385,88.174 70.287,88.174 C16.1@71.939,89.825 C15.1@71.939,86.777 70.541,88.174 U2.2@69.385,88.174 ; C7.2@83.074,78.141 83.392,77.823 C2.1@87.624,77.823 C3.1@87.624,80.998 C4.1@87.624,84.3 C5.1@87.624,87.221 C6.1@87.624,90.015 87.559,90.079 D1.2@83.174,90.079 83.374,89.879 R4.1@83.373,85.76 C12.1@83.373,83.221 C13.1@83.373,81.062 83.374,78.141 C7.2@83.074,78.141
  other v1: 106.62,53.376 107.763,53.376 108.779,53.376 109.922,53.376 95.571,56.297 96.587,56.297 111.319,56.424 112.335,56.424 113.478,56.424 115.51,56.424 142.942,56.678 143.958,56.678 144.974,56.678 145.99,56.678 142.942,57.567 143.958,57.567 144.974,57.567 145.99,57.567 112.716,58.202 113.605,58.202 115.51,58.202 142.942,58.456 143.958,58.456 144.974,58.456 145.99,58.456 129.48,59.091 97.095,62.52 97.095,63.663 98.238,63.663 97.095,64.806 98.238,64.806 99.508,64.806 76.775,65.441 121.225,67.6 111.827,68.489 112.716,69.124 113.986,71.029 104.969,72.807 87.57,73.061 96.841,74.712 66.869,74.839 67.758,74.839 66.869,75.728 67.758,75.728 55.947,76.109 115.383,78.903 116.272,78.903 116.399,79.919 76.775,80.046 116.399,81.062 124.146,81.824 125.162,81.824 114.875,82.332 115.891,82.332 116.907,82.332 124.146,82.713 125.162,82.713 113.859,84.237 120.971,89.698 120.971,90.587 120.971,91.476 141.164,92.873 142.053,92.873 143.069,92.873 145.863,92.873 147.006,92.873 148.149,92.873 149.292,92.873 142.053,93.762 145.863,93.889 147.006,93.889 148.149,93.889 149.292,93.889 131.893,94.27 132.782,94.27
IPWM1: U5.11 U7.5 | length 69.7
  Top Layer w0.178: 86.43,62.959 86.43,61.12 87.062,60.488 v1(87.062,56.043)
  Bottom Layer w0.178: v1(87.062,56.043) 87.062,55.916 87.824,55.154 121.352,55.154 135.195,68.997 135.195,74.966 134.814,75.347 134.632,75.529 133.149,75.529
IPWM2: U5.22 U8.5 | length 28.9
  Top Layer w0.178: v1(108.652,65.187) 109.287,65.187 110.23,66.13 113.483,66.13
  Bottom Layer w0.178: v1(108.652,65.187) 121.225,65.187 127.321,71.283 127.349,71.311 127.349,73.729
KEY1: KEY1.3 KEY1.4 U5.4 | length 12.8
  Bottom Layer w0.178: 133.149,79.029 135.448,79.029 136.719,80.3 136.719,82.443 KEY1.4@138.454,84.178 KEY1.3@142.604,84.178
LEDB1: R18.1 U5.3 | length 13.8
  Bottom Layer w0.178: 133.148,79.53 135.058,79.53 136.211,80.681 136.211,87.196 R18.1@138.84,89.825
NRST: C21.2 REST.3 REST.4 U5.7 | length 16.4
  Bottom Layer w0.178: 133.149,77.529 137.204,77.529 137.735,76.998 137.735,75.601 139.007,74.329 C21.2@139.007,73.453 ; C21.2@139.007,73.453 141.963,73.453 REST.3@142.265,73.755 REST.4@146.415,73.755
PG1: R31.2 U5.27 U7.4 | length 53.1
  Top Layer w0.178: R31.2@85.284,56.289 85.284,58.202 v1(86.046,58.964) 86.046,62.941 86.028,62.959
  Bottom Layer w0.178: v1(86.046,58.964) 88.789,61.707 90.313,61.707 94.428,65.822 103.445,65.822 113.653,76.03 125.05,76.03
PG2: R41.2 U5.25 U8.4 | length 28.1
  Top Layer w0.178: R41.2@105.977,67.346 106.793,66.53 113.483,66.53
  Bottom Layer w0.178: v1(108.398,66.457) 108.398,66.584 116.844,75.029 125.05,75.029
POWEROUT1_CTRL: C20.2 R12.1 U5.29 | length 24.2
  Bottom Layer w0.178: C20.2@103.818,75.474 105.477,75.474 111.065,75.474 112.62,77.028 125.05,77.028
  Bottom Layer w0.254: C20.2@103.818,75.474 R12.1@103.817,77.759
Q2_4: Q2.4 Q3.3 R10.1 | length 7.3
  Bottom Layer w0.254: Q3.3@94.878,76.998 94.879,72.488 R10.1@94.808,72.417 94.928,72.299 Q2.4@97.47,72.299
R2_2: C7.1 R2.2 | length 3.1
  Bottom Layer w0.254: R2.2@78.425,78.767 80.647,78.768 C7.1@81.274,78.141
R5_1: C13.2 R5.1 | length 3.9
  Bottom Layer w0.254: R5.1@78.625,81.405 78.969,81.061 C13.2@82.374,81.061
R8_1: D4.1 Q1.4 R8.1 | length 8.6
  Bottom Layer w0.178: Q1.4@52.645,55.719 56.652,59.726 D4.1@56.72,59.726 56.936,59.509 R8.1@59.503,59.509
R9_1: C14.2 R9.1 | length 3.1
  Bottom Layer w0.178: C14.2@55.693,52.117 R9.1@55.693,55.243
R11_2: LEDG1.2 R11.2 | length 3.2
  Bottom Layer w0.254: LEDG1.2@52.683,89.444 52.861,89.266 R11.2@52.861,86.269
R12_2: Q3.1 R12.2 R13.2 | length 5.6
  Bottom Layer w0.254: Q3.1@97.279,77.948 99.693,77.948 R13.2@99.888,77.751 R12.2@102.817,77.759
R18_2: LEDB1.2 R18.2 | length 3
  Bottom Layer w0.178: R18.2@140.441,89.825 LEDB1.2@143.488,89.825
R25_2: Q4.4 R25.2 | length 5.1
  Top Layer w0.178: R25.2@54.388,81.316 59.081,81.316 Q4.4@59.376,81.61
R26_1: Q5.4 R26.1 | length 6.9
  Top Layer w0.254: R26.1@72.076,97.186 72.076,94.651 73.854,92.873 Q5.4@73.854,91.008
R27_2: Q6.4 R27.2 | length 3.5
  Top Layer w0.254: R27.2@70.591,73.061 70.933,73.061 71.695,73.823 Q6.4@71.695,75.941
R28_2: Q7.4 R28.2 | length 4.8
  Top Layer w0.254: Q7.4@85.538,85.339 85.579,85.38 86.681,85.38 88.784,87.483 R28.2@89.476,87.483
R33_1: C55.2 R33.1 | length 1.8
  Top Layer w0.178: R33.1@95.436,67.219 C55.2@95.436,65.441
R35_2: Q8.4 R35.2 | length 7.3
  Top Layer w0.254: Q8.4@132.569,90.841 133.153,90.836 133.798,91.471 R35.2@133.798,97.28
R36_1: Q9.4 R36.1 | length 5.9
  Top Layer w0.254: Q9.4@142.221,78.522 146.842,78.522 R36.1@147.731,79.411
R37_2: Q10.4 R37.2 | length 3.6
  Top Layer w0.178: R37.2@123.384,78.865 123.6,78.649 Q10.4@126.899,78.649
R38_2: Q11.4 R38.2 | length 4.3
  Top Layer w0.178: Q11.4@136.551,66.33 136.592,66.289 136.592,65.314 138.408,63.498 R38.2@138.408,62.774
R45_1: C75.2 R45.1 | length 1.5
  Top Layer w0.254: C75.2@116.653,55.4 R45.1@116.652,56.939
RSNS1_2: Q4.8 RSNS1.2 RSS1N1.2 | length 11.5
  Top Layer w0.178: RSNS1.2@54.787,78.141 54.847,78.081 Q4.8@61.281,78.081 61.281,73.829 RSS1N1.2@61.796,73.314
RSNS2_1: Q5.3 RSNS2.1 RSS2P1.2 | length 40.3
  Top Layer w0.178: RSNS2.1@75.377,96.785 75.124,96.532 Q5.3@75.124,91.008 Q5.3@76.394,91.008 Q5.3@77.664,91.008 v1(79.655,93) ; v1(87.824,93) 91.126,89.698 91.126,81.316 93.92,78.522 93.92,75.982 93.15,75.212 RSS2P1.2@92.903,75.211
  Bottom Layer w0.178: v1(79.655,93) v1(87.824,93)
RSNS3_2: Q8.8 RSNS3.2 RSS1N2.2 | length 17.8
  Top Layer w0.178: 123.256,86.784 123.507,87.036 Q8.8@126.899,87.036 ; Q8.8@129.039,88.936 129.039,95.75 RSNS3.2@130.114,96.826 130.199,96.741 Q8.8@130.199,91.105
RSNS4_1: Q9.3 RSNS4.1 RSS2P2.2 | length 52.1
  Top Layer w0.178: RSS2P2.2@124.012,62.773 124.654,62.132 v1(124.654,59.726) ; v1(126.559,61.631) 126.94,61.631 127.194,61.377 127.194,56.805 128.083,55.916 130.496,55.916 v1(130.877,55.789) ; v1(133.29,57.44) 135.957,60.107 141.672,60.107 142.688,61.123 v1(142.688,64.298) ; Q9.3@142.221,77.252 Q9.3@142.221,75.982 ; v1(143.704,70.663) 143.704,73.228 Q9.3@142.221,74.712 Q9.3@142.221,75.982 ; RSNS4.1@147.275,76.109 147.148,75.982 Q9.3@142.221,75.982
  Bottom Layer w0.178: v1(124.654,59.726) v1(126.559,61.631) ; v1(130.877,55.789) 132.274,55.789 133.29,56.805 v1(133.29,57.44) ; v1(142.688,64.298) 142.688,69.124 143.704,70.14 v1(143.704,70.663)
S$45: 
S$47: 
S$49: 
S$51: 
S$56: 
S$58: 
S$60: 
S$62: 
S$67: 
S$30525: 
S$30531: 
S$30533: 
S$30535: 
SWCLK: R14.2 U5.37 | length 25.9
  Bottom Layer w0.178: 126.349,81.829 126.349,89.869 131.512,95.032 138.49,95.032 R14.2@141.037,97.578
SWDIO: R15.2 U5.34 | length 31
  Bottom Layer w0.178: 125.05,79.53 122.759,79.53 121.86,80.427 121.86,83.475 121.987,83.475 123.13,84.618 123.13,87.412 131.639,95.921 137.092,95.921 R15.2@138.751,97.578
U1_1: C1.1 U1.1 | length 4.5
  Bottom Layer w0.254: U1.1@67.91,78.649 69.271,77.288 C1.1@69.272,74.712
U1_3: R3.1 R6.2 U1.3 | length 12
  Bottom Layer w0.254: R6.2@57.471,81.1 61.767,81.1 R3.1@62.059,80.808 62.059,81.459 62.932,82.332 64.837,82.332 65.98,81.189 U1.3@67.91,81.189